# Altium PCB ESP32_CAN_V2.2.PcbDoc
Units mm, origin at the board's own origin, x right, y up, seen from the top; angles counter-clockwise.
Board outline 80 x 75 mm, 2 copper layers (Top Layer, Bottom Layer), stack 0.533 mm thick; 87 components, 94 nets, 361 pads, 61 vias.
Unrouted connection lines stored in the file: 66.
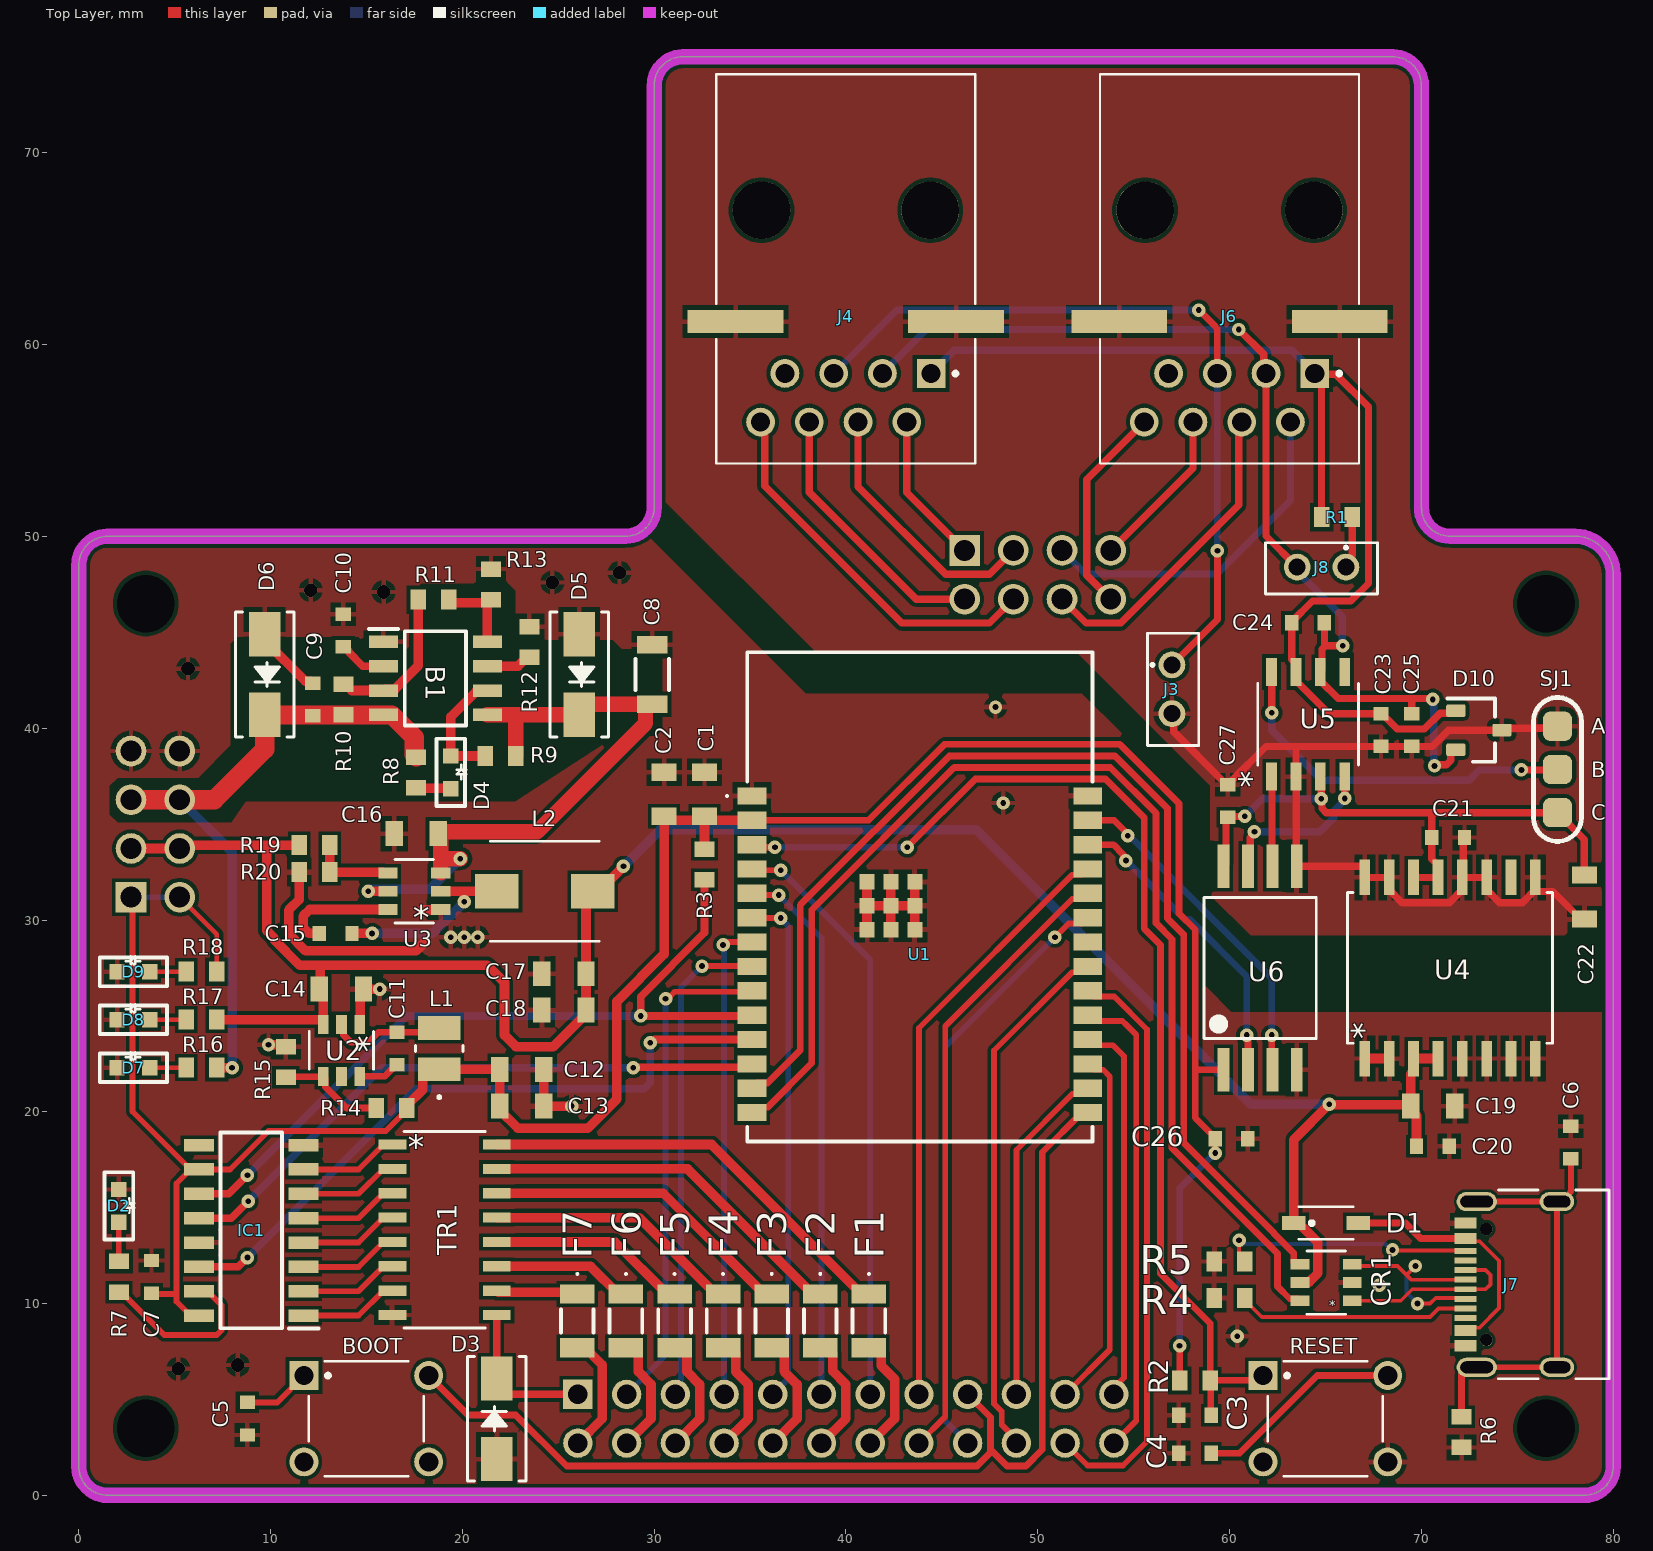
[diagram p0: Top Layer view]
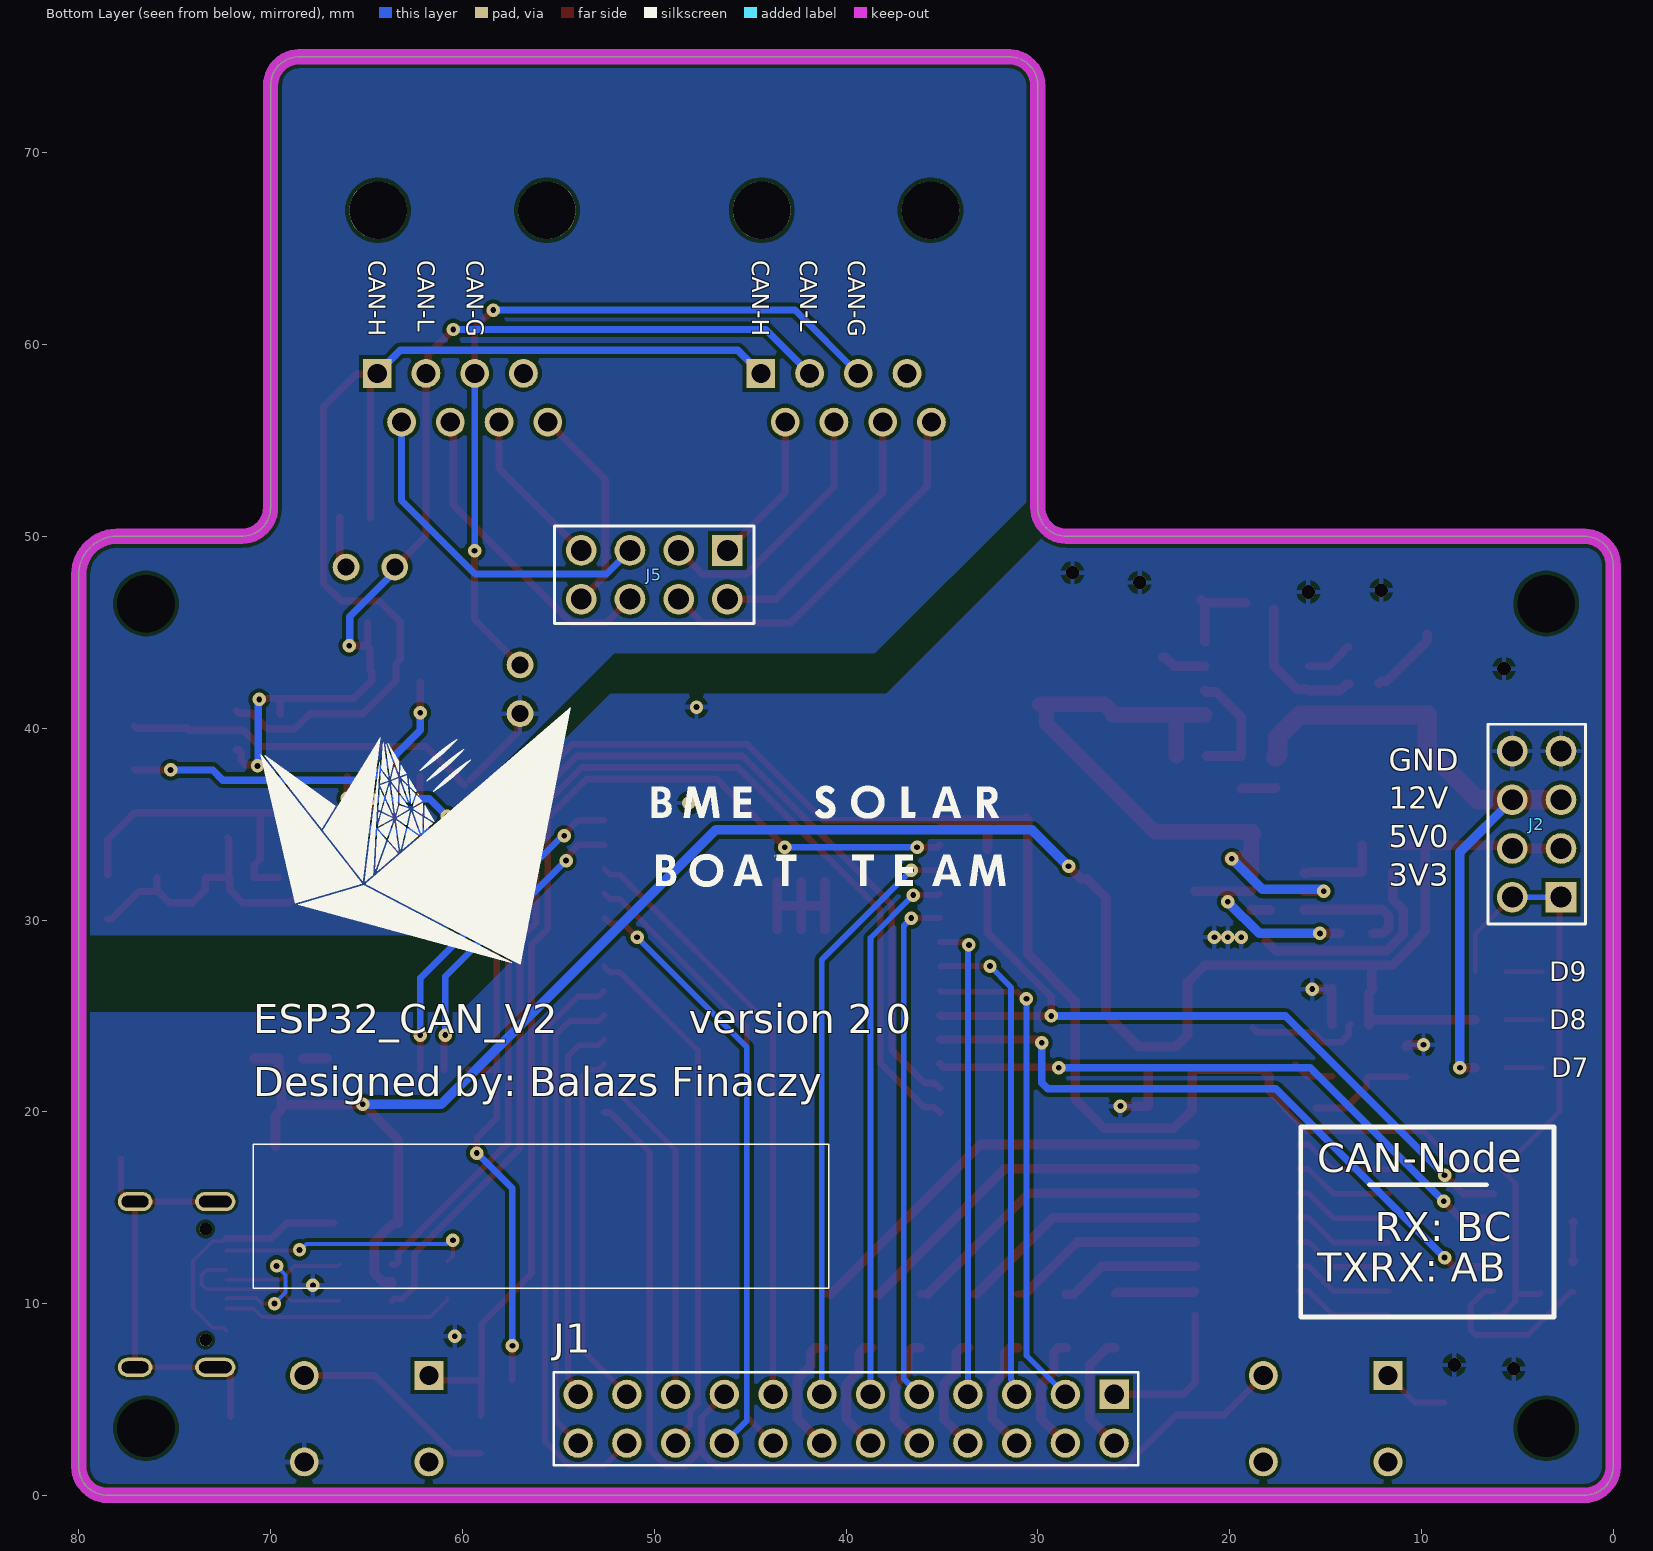
[diagram p1: Bottom Layer view, seen from below]
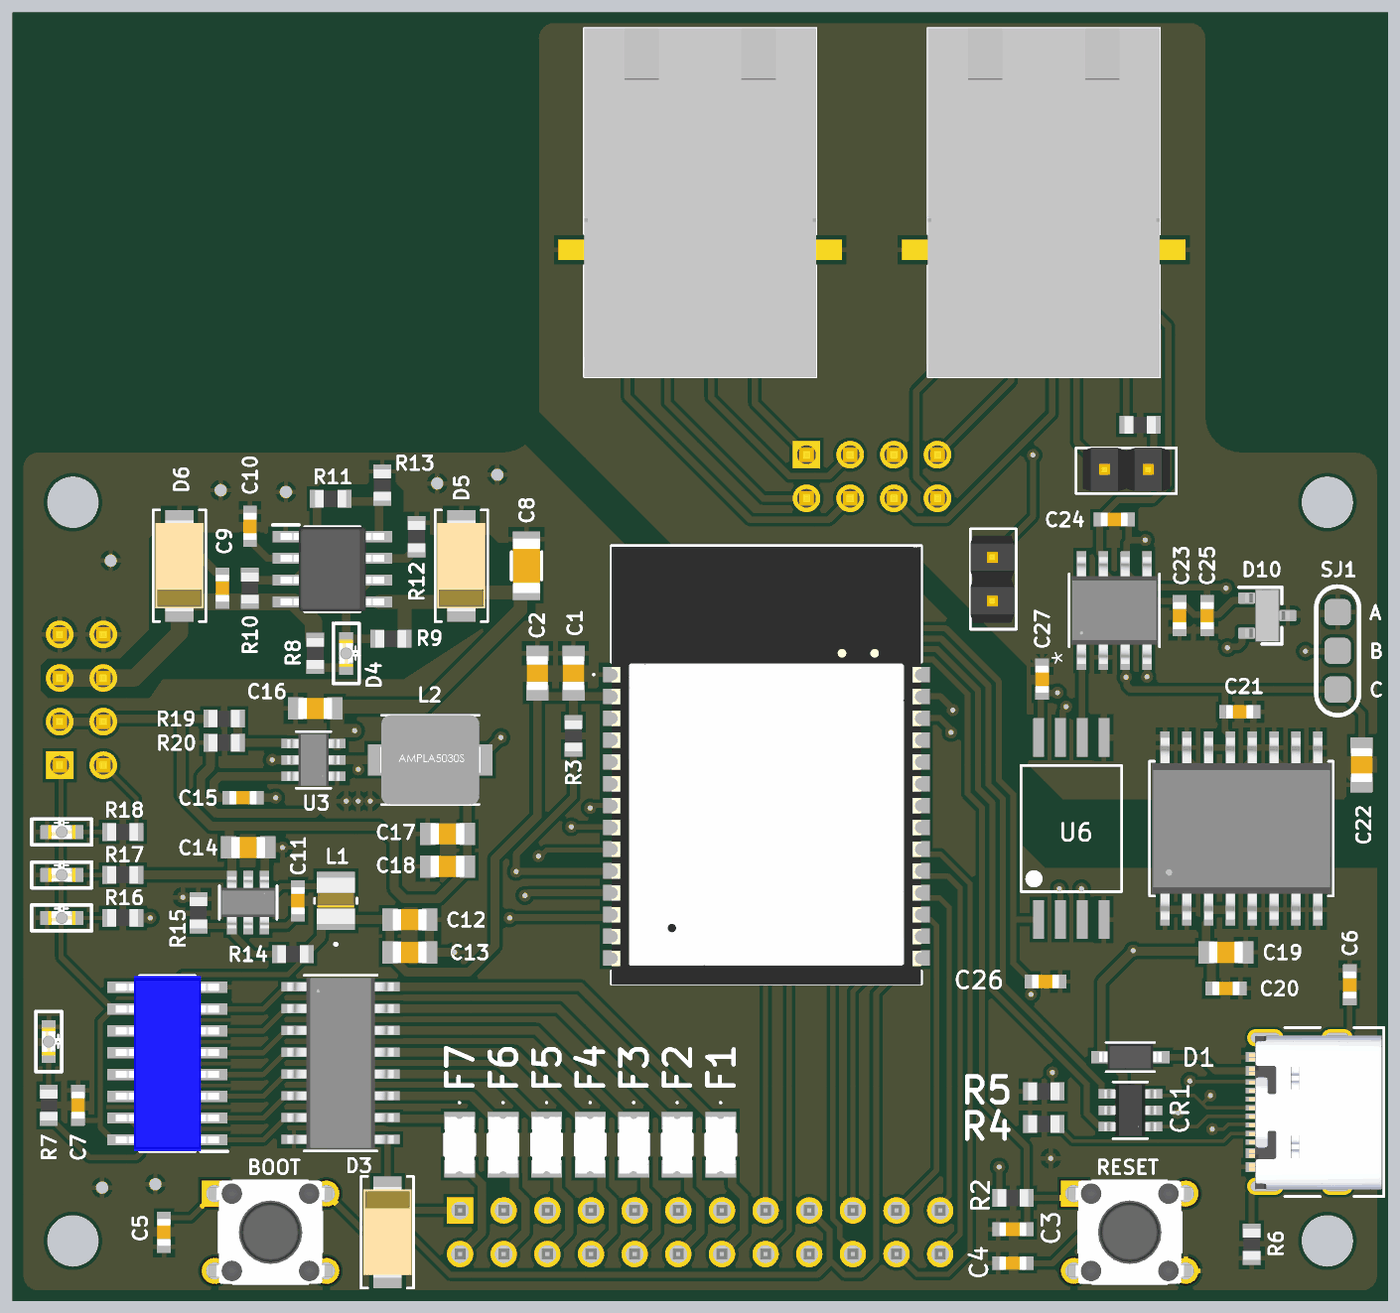
[diagram p2: 3D render of the assembled board from above, using the file's embedded part models]
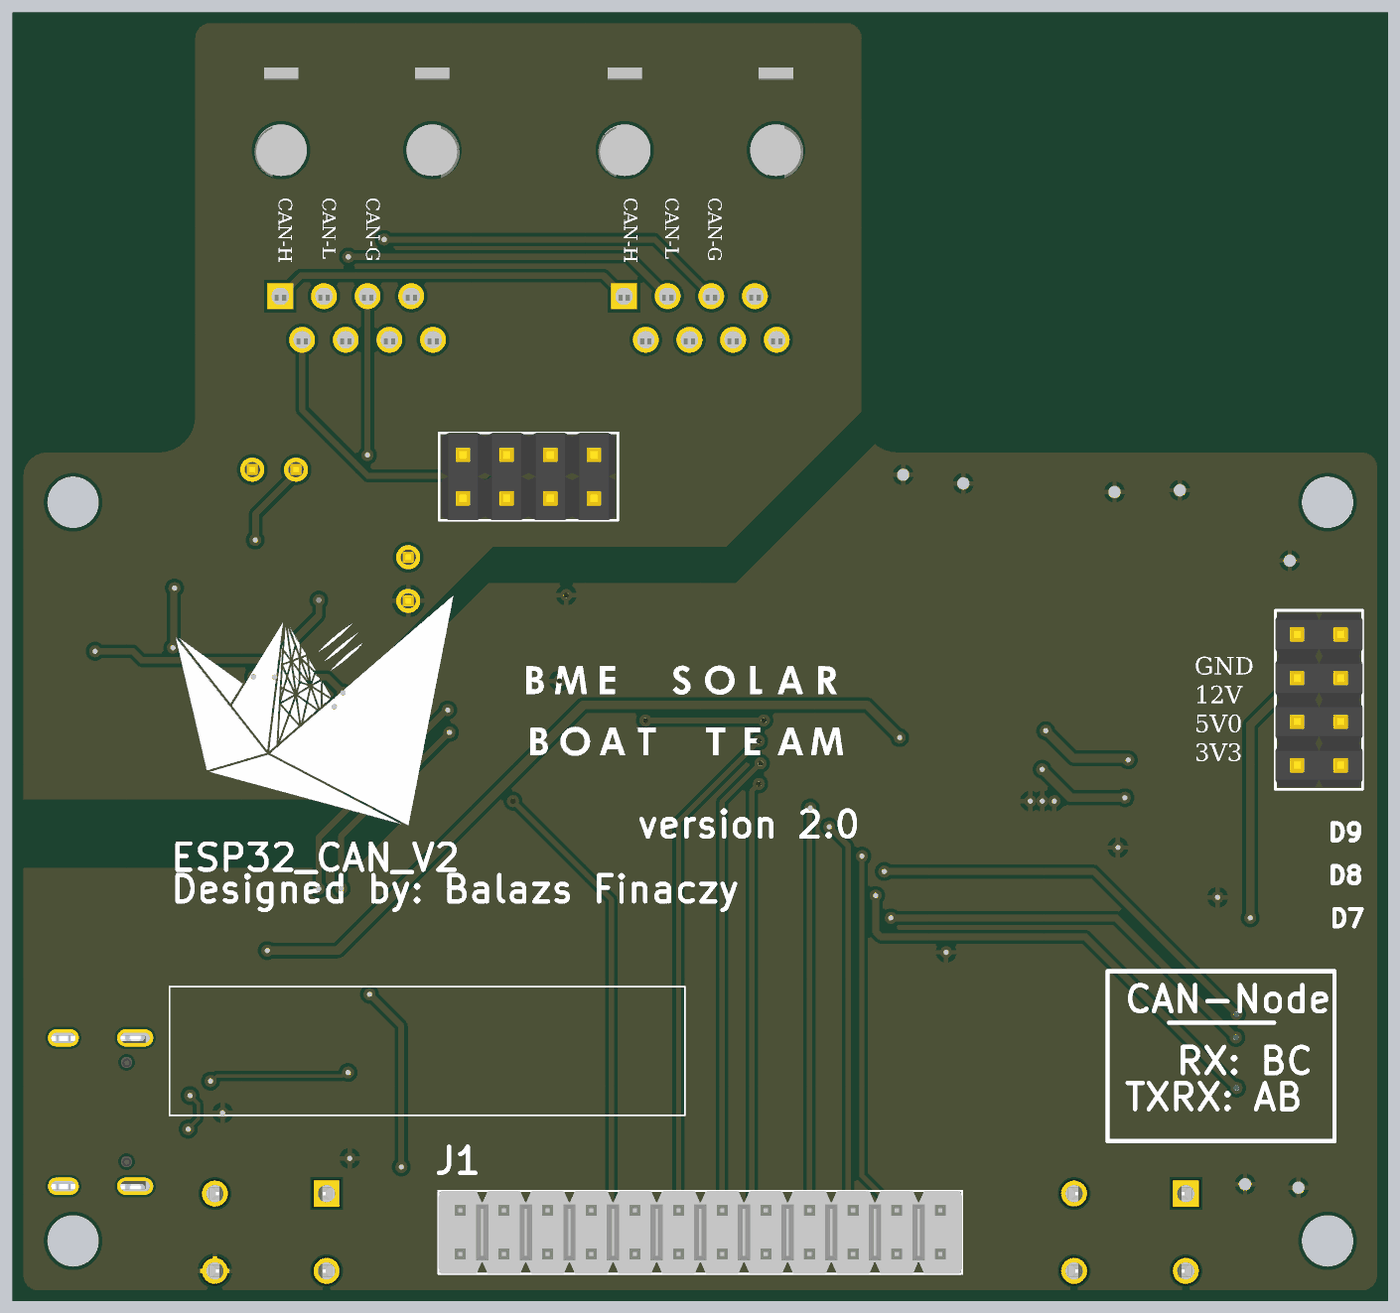
[diagram p3: 3D render of the assembled board from below, using the file's embedded part models]

## Layer stack, top to bottom
Top Solder: solder mask 0.0102, Solder Resist, Dk 3.5
Top Layer: signal copper 0.0356
Dielectric 2: prepreg 0.0711, PP-006, Dk 4.1
Dielectric 1: dielectric 0.32, FR-4, Dk 4.8
Dielectric 3: prepreg 0.0711, PP-006, Dk 4.1
Bottom Layer: signal copper 0.0356
Bottom Solder: solder mask 0.0102, Solder Resist, Dk 3.5

## Board outline
1.506,0.006 cw(c1.506,1.506) 0.006,1.506 0.006,48.506 cw(c1.506,48.506) 1.506,50.006 28.506,50.006 ccw(c28.506,51.506) 30.006,51.506 30.006,73.506 cw(c31.506,73.506) 31.506,75.006 68.506,75.006 cw(c68.506,73.506) 70.006,73.506 70.006,51.506 ccw(c71.506,51.506) 71.506,50.006 78.006,50.006 cw(c78.006,48.006) 80.006,48.006 80.006,1.506 cw(c78.506,1.506) 78.506,0.006

## Design rules (kind name [scope] priority, off if disabled: settings)
Clearance USB_C [InComponent('J7')] p1: gap=0.15 ignorepadtopadclearanceinfootprint=FALSE
Clearance [All] p2: gap=0.2 ignorepadtopadclearanceinfootprint=FALSE
HoleSize [All] p1: absolutevalues=TRUE maxlimit=4 minlimit=0.025 maxpercent=80.000 minpercent=20.000
HoleToHoleClearance [All] p1: gap=0.3 allowstackedmicrovias=TRUE
MinimumAnnularRing [All] p1: minimumring=0.19
PlaneClearance PlaneClearance_1 [All] p1: clearance=0.508
PlaneClearance [InNet('NetC15_1')] p2: clearance=0
PolygonConnect [All] p1: connectstyle=Relief reliefconductorwidth=0.254 reliefentries=4 polygonreliefangle="90 Angle" airgapwidth=0.254
RoutingVias [All] p1: holewidth=0.3 width=0.7 viastyle="Through Hole" minholewidth=0.3 minwidth=0.7 maxholewidth=0.45 maxwidth=1
SolderMaskExpansion [All] p1: expansion=0 istentingtop=FALSE
SupplyNets "Schematic Supply Nets_4" [InNet('+3V3')] p1: voltage=0.000
SupplyNets "Schematic Supply Nets_3" [InNet('+5V')] p2: voltage=0.000
SupplyNets "Schematic Supply Nets_2" [InNet('+12V_fused')] p3: voltage=0.000
SupplyNets "Schematic Supply Nets_1" [InNet('+12V')] p4: voltage=0.000
SupplyNets "Schematic Supply Nets" [InNet('GND')] p5: voltage=0.000
Width [All] p1: maxlimit=2 minlimit=0.2 preferedwidth=0.3 minimp=50.000000 maximp=50.000000 favimp=50.000000
27 further rules are at their usual default settings.

## Classes and differential pairs
net class OUT[6..0]: OUT0 OUT1 OUT2 OUT3 OUT4 OUT5 OUT6
net class GPIO[15..0]: GPIO0 GPIO1 GPIO2 GPIO3 GPIO4 GPIO5 GPIO6 GPIO7 GPIO8 GPIO9 GPIO10 GPIO11 GPIO12 GPIO13 GPIO14 GPIO15
component class U_ESP32_CAN_V2-usb: C6 CR1 D1 J7 R4 R5 R6
component class U_ESP32_CAN_V2-power: 3 B1 C8 C9 C10 C11 C12 C13 C14 C15 C16 C17 C18 D4 D5 D6 D7 D8 D9 L1 L2 R8 R9 R10 R11 R12 R13 R14 R15 R16 R17 R18 R19 R20 U2 U3
component class U_ESP32_CAN_V2-out: C7 D2 D3 F1 F2 F3 F4 F5 F6 F7 IC1 R7 TR1
component class U_ESP32_CAN_V2-mcu: BOOT C1 C2 C3 C4 C5 R2 R3 RESET U1
component class U_ESP32_CAN_V2-can: C19 C20 C21 C22 C23 C24 C25 C26 C27 D10 SJ1 U4 U5 U6
component class ESP32_CAN_V2-main: J1 J2 J3 J4 J5 J6 J8 R1

## Components (designator, comment, footprint, x,y, rotation, side; value= is the part's Value field where it differs from the comment)
B1 "TPS25921ADR" SOIC127P600X175-8N 18.6,42.6 r0 top
BOOT "TS02-66-70-BK-260-SCR-D" SW_TS02-66-70-BK-260-SCR-D 15,4 r0 top (schematic designator S2)
C1 "10u" C0805 32.627,36.554 r270 top
C2 "10u" C0805 30.527,36.554 r270 top
C3 "1u" C0603 58.2,4.177 r0 top
C4 "0.1u" C0603 58.2,2.2 r0 top
C5 "0.1u" C0603 8.8,4 r90 top
C6 "1n" C0603 77.8,18.4 r270 top
C7 "100n" C0603 3.8,11.4 r90 top
C8 "100u" C1206 29.9,42.8 r270 top
C9 "0.1u" C0603 12.2,41.5 r270 top
C10 "2n" C0603 13.8,45.1 r270 top
C11 "100n" C0603 16.6,23.3 r90 top
C12 "22u" C0805 23.1,22.2 r180 top
C13 "22u" C0805 23.1,20.3 r180 top
C14 "10u" C0805 13.7,26.4 r180 top
C15 "0.1u" C0603 13.4,29.3 r180 top
C16 "2u2" C0805 17.6,34.5 r0 top
C17 "22u" C0805 25.3,27.2 r0 top
C18 "22u" C0805 25.3,25.3 r0 top
C19 "10u" C0805 70.6,20.3 r180 top
C20 "100n" C0603 70.6,18.2 r180 top
C21 "100n" C0603 71.4,34.3 r180 top
C22 "10u" C0805 78.5,31.2 r90 top
C23 "47p" C0603 67.9,39.9 r90 top
C24 "47p" C0603 64.1,45.5 r180 top
C25 "47p" C0603 69.5,39.9 r270 top
C26 "100n" C0603 60.1,18.6 r180 top
C27 "100n" C0603 59.9,36.2 r270 top
CR1 "USBLC6-2SC6" SOT23-6L_STM 65.035,11.1 r180 top
D1 "1N5819HW-7-F" SOD3715X145N 65.035,14.2 r0 top
D2 "LED" LED 2.093,15.1 r90 top
D3 "SMAJ30A" SMASeries_LTF 21.8,4 r270 top
D4 "LED" LED 19.4,37.7 r90 top
D5 "SMAJ30A" SMASeries_LTF 26.1,42.8 r90 top
D6 "SMAJ58CA" SMASeries_LTF 9.7,42.8 r90 top
D7 "LED" LED 2.85,22.3 r180 top
D8 "LED" LED 2.85,24.8 r180 top
D9 "LED" LED 2.85,27.3 r180 top
D10 "NUP2105L" SOT-23 73,39.9 r0 top
F1 "PTC Fuse" PTSAHT120624V050 41.2,9.1 r270 top
F2 "PTC Fuse" PTSAHT120624V050 38.667,9.1 r270 top
F3 "PTC Fuse" PTSAHT120624V050 36.133,9.1 r270 top
F4 "PTC Fuse" PTSAHT120624V050 33.6,9.1 r270 top
F5 "PTC Fuse" PTSAHT120624V050 31.067,9.1 r270 top
F6 "PTC Fuse" PTSAHT120624V050 28.533,9.1 r270 top
F7 "PTC Fuse" PTSAHT120624V050 26,9.1 r270 top
IC1 "74HC595D" SOIC127P600X175-16N 9,13.821 r180 top
J1 "PinHeader_2x12" AMPHENOL_10129381-924003BLF 40,4 r0 bottom locked
J2 "Conn_2x4" CONN_10129381-X08002XLF_AMP 4,35 r90 bottom locked
J3 "Jumper_1x1" CON2_1X2_TU_TSW 57,42.03 r270 top
J4 "RJE56" AMPHENOL_RJE561881410 40,67 r180 top
J5 "Conn_2x4" CONN_10129381-X08002XLF_AMP 50,48 r0 bottom locked
J6 "RJE56" AMPHENOL_RJE561881410 60,67 r180 top
J7 "USB4105-GF-A" USB4105_GCT 75.8,11 r90 top
J8 "Jumper_1x1" CON2_1X2_TU_TSW 64.8,48.4 r180 top
L1 "LCENA2520MKT2R2M0NK" IND_LCEN_2520MK_TAY 18.8,23.3 r90 top
L2 "AMPLA5030S-6R8MT" IND_AMPLA5030S-6R8MT 24.3,31.5 r0 top
R1 "120R" R0603 65.6,51 r0 top
R2 "10k" R0603 58.2,6 r180 top
R3 "3k3" R0603 32.627,32.9 r90 top
R4 "5k1" R0603 60,10.3 r0 top
R5 "5k1" R0603 60,12.2 r0 top
R6 "100k" R0603 72.1,3.3 r90 top
R7 "120R" R0603 2.1,11.4 r90 top
R8 "1k" R0603 17.6,37.7 r90 top
R9 "100k" R0603 21.998,38.55 r0 top
R10 "470k" R0603 13.8,41.5 r270 top
R11 "64k9" R0603 18.5,46.7 r180 top
R12 "154k" R0603 23.5,44.5 r270 top
R13 "30k9" R0603 21.5,47.5 r270 top
R14 "31k6" R0603 16.302,20.2 r0 top
R15 "10k" R0603 10.8,22.6 r270 top
R16 "2.2k" R0603 6.4,22.307 r0 top
R17 "1k" R0603 6.4,24.807 r0 top
R18 "320R" R0603 6.4,27.307 r0 top
R19 "100k" R0603 12.3,33.9 r180 top
R20 "13k7" R0603 12.3,32.5 r0 top
RESET "TS02-66-70-BK-260-SCR-D" SW_TS02-66-70-BK-260-SCR-D 65,4 r0 top (schematic designator S1)
SJ1 "Solderj Jumper" "SolderJumper 1x2" 77.1,35.6 r90 top
TR1 "ULN2003ADR" ULN2003ADR2G_OSI 19.079,13.851 r0 top
U1 "ESP32-C6-WROOM-1-N4" ESP32C6WROOM1N4 43.855,31.21 r0 top
U2 "AP62250WU-7" TSOT26STANDARD_DIO 13.7,23.2 r270 top
U3 "LMR51430YDDCR" SOT-23-THIN-6_DDC_TEX 17.5,31.5 r180 top
U4 "R05CTE05S-R" SMD_16_10.35X7.5X2.5_RCP 71.5,27.5 r90 top
U5 "TCAN1051HGDR" D8_TEX 64.1,40.2 r90 top
U6 "ISO6721FQDWVRQ1" DWV0008A-IPC_A 61.6,27.5 r90 top

## Footprints (in the part's own frame and the unit in brackets; to place one, negate y for a bottom-side part, rotate by r counter-clockwise, add the part's x,y. Pads: shape width x height; smd on the part's side, far side on the other; paste and mask are expansions set on the pad)
AMPHENOL_10129381-924003BLF [mm]
  rect 1.53x1.53 / inner round 1.53 / far side rect 1.53x1.53 hole 1.02: 01(-13.97,-1.27)
  round 1.53 hole 1.02: 02(-13.97,1.27) 03(-11.43,-1.27) 04(-11.43,1.27) 05(-8.89,-1.27) 06(-8.89,1.27) 07(-6.35,-1.27) 08(-6.35,1.27) 09(-3.81,-1.27) 10(-3.81,1.27) 11(-1.27,-1.27) 12(-1.27,1.27) 13(1.27,-1.27) 14(1.27,1.27) 15(3.81,-1.27) 16(3.81,1.27) 17(6.35,-1.27) 18(6.35,1.27) 19(8.89,-1.27) 20(8.89,1.27) 21(11.43,-1.27) 22(11.43,1.27) 23(13.97,-1.27) 24(13.97,1.27)
  silkscreen extent -15.24,-2.41 15.24,2.41, body extent -15.24,-2.41 15.24,2.41, height 10.42
AMPHENOL_RJE561881410 [mm]
  rect 1.5x1.5 / inner round 1.5 / far side rect 1.5x1.5 hole 1: 1(-4.445,8.5)
  round 1.5 hole 1: 2(-3.175,11.04) 3(-1.905,8.5) 4(-0.635,11.04) 5(0.635,8.5) 6(1.905,11.04) 7(3.175,8.5) 8(4.445,11.04)
  rect 5x1.2 smd paste-3: G1(-5.75,5.8) G2(5.75,5.8)
  round 3 hole 3 unplated: ""(-4.4,0) ""(4.4,0)
  silkscreen extent -6.75,-7.1 6.75,13.2, body extent -6.75,-7.1 6.75,13.2, height 14.61
C0603 [mm] "Ceramic Capacitors, 0603, body 1.6x0.8mm"
  rect 0.7x0.8 smd: 1(-0.85,0) 2(0.85,0)
  body extent -0.8,-0.4 0.8,0.4, height 0.8
C0805 [mm] "Ceramic Capacitors, body 2x1.25mm"
  rect 0.9x1.3 smd: 1(-1.15,0) 2(1.15,0)
  body extent -1,-0.63 1,0.63, height 0.8
C1206 [mm] "Ceramic Capacitors, body 3.2x1.6mm"
  rect 0.9x1.6 smd: 1(-1.55,0) 2(1.55,0)
  silkscreen extent -0.8,-0.87 0.8,0.87, body extent -1.6,-0.8 1.6,0.8, height 0.95
CON2_1X2_TU_TSW [mil]
  round 55 hole 35 paste-99999 mask+0: 1(-50,0) 2(50,0)
  silkscreen extent -115,-50 115,55, body extent -100,-50 100,50, height 500
CONN_10129381-X08002XLF_AMP [mil]
  rect 63x63 hole 43 paste-99999 mask+0: 1(-150,-50)
  round 63 hole 43 paste-99999 mask+0: 2(-150,50) 3(-50,-50) 4(-50,50) 5(50,-50) 6(50,50) 7(150,-50) 8(150,50)
  silkscreen extent -205,-100 205,100, body extent -200,-100 200,100, height 338
D8_TEX [mm]
  rect 1.455x0.558 smd paste+0 mask+0: 1(-2.721,1.905) 2(-2.721,0.635) 3(-2.721,-0.635) 4(-2.721,-1.905) 5(2.721,-1.905) 6(2.721,-0.635) 7(2.721,0.635) 8(2.721,1.905)
  silkscreen extent -2.12,-2.63 2.12,2.63, body extent -3.1,-2.5 3.1,2.5, height 1.76
DWV0008A-IPC_A [mm]
  rect 2.254x0.622 smd paste+0 mask+0: 1(-5.301,1.905) 2(-5.301,0.635) 3(-5.301,-0.635) 4(-5.301,-1.905) 5(5.301,-1.905) 6(5.301,-0.635) 7(5.301,0.635) 8(5.301,1.905)
  silkscreen extent -3.67,-2.93 3.67,2.93
ESP32C6WROOM1N4 [mm]
  rect 1.5x0.9 smd: 1(-8.75,5.26) 2(-8.75,3.99) 3(-8.75,2.72) 4(-8.75,1.45) 5(-8.75,0.18) 6(-8.75,-1.09) 7(-8.75,-2.36) 8(-8.75,-3.63) 9(-8.75,-4.9) 10(-8.75,-6.17) 11(-8.75,-7.44) 12(-8.75,-8.71) 13(-8.75,-9.98) 14(-8.75,-11.25) 15(8.75,-11.25) 16(8.75,-9.98) 17(8.75,-8.71) 18(8.75,-7.44) 19(8.75,-6.17) 20(8.75,-4.9) 21(8.75,-3.63) 22(8.75,-2.36) 23(8.75,-1.09) 24(8.75,0.18) 25(8.75,1.45) 26(8.75,2.72) 27(8.75,3.99) 28(8.75,5.26)
  rect 0.8x0.8 smd: 29(-1.505,-0.46) 30(-1.505,0.79) 31(-2.755,0.79) 32(-2.755,-0.46) 33(-2.755,-1.71) 34(-1.505,-1.71) 35(-0.255,-1.71) 36(-0.255,-0.46) 37(-0.255,0.79)
  silkscreen extent -10.1,-12.75 9,12.75, body extent -9.01,-12.8 9.01,12.7, height 3.1
IND_AMPLA5030S-6R8MT [mm]
  rect 2.25x1.8 smd: 1(-2.5,0) 2(2.5,0)
  silkscreen extent -2.85,-2.6 2.85,2.6, body extent -2.92,-2.6 2.92,2.6, height 2.8
IND_LCEN_2520MK_TAY [mil]
  rect 48.78x87 smd paste+0 mask+0: 1(-42.39,0) 2(42.39,0)
  silkscreen extent -103,-48 6,48, body extent -53,-44 53,44, height 47
LED [mm]
  rect 0.8x0.8 smd: 1(-0.85,0) 2(0.85,0)
  silkscreen extent -1.75,-0.8 1.75,0.75, body extent -0.8,-0.4 0.8,0.4, height 0.95
PTSAHT120624V050 [mm]
  rect 1x1.8 smd: 1(-1.4,0) 2(1.4,0)
  silkscreen extent -2.5,-0.85 0.6,0.85, body extent -1.62,-0.85 1.68,0.85, height 1.06
R0603 [mm]
  rect 0.808x1.041 smd paste+0 mask+0: 1(-0.798,0) 2(0.798,0)
  body extent -0.9,-0.5 0.9,0.5, height 0.56
SMASeries_LTF [mm]
  rect 2.3x1.651 smd paste+0 mask+0: 1(-2.1,0) 2(2.1,0)
  silkscreen extent -3.25,-1.54 3.25,1.52, body extent -2.64,-1.4 2.64,1.4, height 2.34
SMD_16_10.35X7.5X2.5_RCP [mm]
  rect 1.849x0.558 smd paste+0 mask+0: 1(-4.722,4.445) 2(-4.722,3.175) 3(-4.722,1.905) 4(-4.722,0.635) 5(-4.722,-0.635) 6(-4.722,-1.905) 7(-4.722,-3.175) 8(-4.722,-4.445) 9(4.722,-4.445) 10(4.722,-3.175) 11(4.722,-1.905) 12(4.722,-0.635) 13(4.722,0.635) 14(4.722,1.905) 15(4.722,3.175) 16(4.722,4.445)
  silkscreen extent -3.92,-5.35 3.92,5.35, body extent -5.3,-5.22 5.3,5.22, height 2.64
SOD3715X145N [mm]
  rect 1.21x0.73 smd: A(1.68,0) C(-1.68,0)
  silkscreen extent -1.43,-0.85 1.43,0.85, body extent -1.83,-0.77 1.83,0.77, height 1.51
SOIC127P600X175-8N [mm]
  rect 1.528x0.65 smd: 1(-2.711,1.905) 2(-2.711,0.635) 3(-2.711,-0.635) 4(-2.711,-1.905) 5(2.711,-1.905) 6(2.711,-0.635) 7(2.711,0.635) 8(2.711,1.905)
  silkscreen extent -3.47,-2.45 1.6,2.58, body extent -3.01,-2.45 3.01,2.45, height 1.63
SOIC127P600X175-16N [mm]
  rect 1.55x0.65 smd: 1(-2.725,4.445) 2(-2.725,3.175) 3(-2.725,1.905) 4(-2.725,0.635) 5(-2.725,-0.635) 6(-2.725,-1.905) 7(-2.725,-3.175) 8(-2.725,-4.445) 9(2.725,-4.445) 10(2.725,-3.175) 11(2.725,-1.905) 12(2.725,-0.635) 13(2.725,0.635) 14(2.725,1.905) 15(2.725,3.175) 16(2.725,4.445)
  silkscreen extent -3.5,-5.1 1.6,5.12, body extent -3,-5.1 3,5.1, height 1.56
"SolderJumper 1x2" [mil]
  rrect50% 60x60 smd: 1(88.58,0) 2(0,0) 3(177.17,0)
  silkscreen extent -59,-49 236,49
SOT23-6L_STM [mil]
  rect 38.5x22 smd paste+0 mask+0: 1(-53.75,37.4) 2(-53.75,0) 3(-53.75,-37.4) 4(53.75,-37.4) 5(53.75,0) 6(53.75,37.4)
  silkscreen extent -40,-65 40,65, body extent -59,-60 59,60, height 57
SOT-23 [mm] "SOT23, 3-Leads, IPC Medium Density, TO-236"
  rrect25% 1x0.65 smd: 1(-1.2,1.02) 2(-1.2,-1.02) 3(1.2,0)
  silkscreen extent -1.65,-1.65 0.85,1.65, body extent -1.3,-1.52 1.3,1.52, height 1.3
SOT-23-THIN-6_DDC_TEX [mm]
  rect 0.998x0.558 smd paste+0 mask+0: 1(-1.375,0.95) 2(-1.375,0) 3(-1.375,-0.95) 4(1.375,-0.95) 5(1.375,0) 6(1.375,0.95)
  silkscreen extent -1,-1.65 1,1.65, body extent -1.52,-1.52 1.52,1.52, height 1.09
SW_TS02-66-70-BK-260-SCR-D [mm]
  rect 1.508x1.508 / inner round 1.508 / far side rect 1.508x1.508 hole 1 mask+0.102: 1(-3.25,2.25)
  round 1.508 hole 1 mask+0.102: 2(3.25,2.25) 3(-3.25,-2.25) 4(3.25,-2.25)
  silkscreen extent -3,-3 3,3, body extent -3.6,-3 3.6,3, height 7
TSOT26STANDARD_DIO [mm]
  rect 0.998x0.558 smd paste+0 mask+0: 1(-1.35,0.95) 2(-1.35,0) 3(-1.35,-0.95) 4(1.35,-0.95) 5(1.35,0) 6(1.35,0.95)
  silkscreen extent -0.98,-1.68 0.98,1.68, body extent -1.5,-1.55 1.5,1.55, height 0.99
ULN2003ADR2G_OSI [mm]
  rect 1.455x0.533 smd paste+0 mask+0: 1(-2.721,4.445) 2(-2.721,3.175) 3(-2.721,1.905) 4(-2.721,0.635) 5(-2.721,-0.635) 6(-2.721,-1.905) 7(-2.721,-3.175) 8(-2.721,-4.445) 9(2.721,-4.445) 10(2.721,-3.175) 11(2.721,-1.905) 12(2.721,-0.635) 13(2.721,0.635) 14(2.721,1.905) 15(2.721,3.175) 16(2.721,4.445)
  silkscreen extent -2.12,-5.12 2.12,5.12, body extent -3.1,-4.99 3.1,4.99, height 1.73
USB4105_GCT [mil]
  round 26 / inner round 60 / far side round 26 hole 26 unplated paste-99999 mask+0: 17(-113.78,94.91) 18(113.78,94.91)
  rect 23x45 smd paste+0 mask+0: A1-B12(-125.98,137.24) A4-B9(-94.49,137.24) B1-A12(125.98,137.24) B4-A9(94.49,137.24)
  rect 12x45 smd paste+0 mask+0: A5(-49.21,137.24) A6(-9.84,137.24) A7(9.84,137.24) A8(49.21,137.24) B5(68.9,137.24) B6(29.53,137.24) B7(-29.53,137.24) B8(-68.9,137.24)
  oval 39.37x70.87 / inner oval 39x71 / far side oval 39.37x70.87 hole 55 slot 24 at 0 deg paste-99999 mask+0: SHELL(-170.08,-49.97) SHELL(170.08,-49.97)
  oval 39.37x82.68 / inner oval 39x83 / far side oval 39.37x82.68 hole 67 slot 24 at 0 deg paste-99999 mask+0: SHELL(-170.08,114.6) SHELL(170.08,114.6)
  silkscreen extent -194,-157 194,70, body extent -177,-152 175,152, height 130

## Part data
B1: "18V, 1.6A, 90m eFuse with Adjustable +/-2% Accurate Current Limit", Manufacturer_Name="Texas Instruments", Mouser Part Number=595-TPS25921ADR, Datasheet Link=http://www.ti.com/lit/gpn/tps25921a, Geometry.Height=1.75mm, Manufacturer_Part_Number=TPS25921ADR, Mouser Price/Stock=https://www.mouser.co.uk/ProductDetail/Texas-Instruments/TPS25921ADR?qs=m%2F7bTylgptfvwfVPRm0ALQ%3D%3D
BOOT RESET: "6 x 6 mm, 7 mm Actuator Height, 260 gf, Black, Short Crimped, Through Hole, SPST, Tactile Switch", Package=None, Check_prices=https://www.snapeda.com/parts/TS02-66-70-BK-260-SCR-D/Same+Sky/view-part/?ref=eda, MF="Same Sky", MP=TS02-66-70-BK-260-SCR-D, SnapEDA_Link=https://www.snapeda.com/parts/TS02-66-70-BK-260-SCR-D/Same+Sky/view-part/?ref=snap
C1 C2 C3 C4 C5 C6 C7 C8 C9 C10 C11 C12 C13 C14 C15 C16 C17 C18 C19 C20 C21 C22 C23 C24 C25 C26 C27: library part C
CR1: "ESD Protection for USB 2.0 High Speed", Manufacturer_Name=STMicroelectronics, Copyright="Copyright (C) 2025 Ultra Librarian. All rights reserved.", Manufacturer_Part_Number=USBLC6-2SC6, RefDes=RefDes, Type=Type
D1: "Diode Schottky 40 V 1A Surface Mount SOD-123", Package="SOD-123 Fairchild Semiconductor", Availability="In Stock", Check_prices=https://www.snapeda.com/parts/1N5819HW-7-F/Diodes+Inc./view-part/?ref=eda, MF="Diodes Inc.", MP=1N5819HW-7-F, Price=None, Purchase-URL=https://pricing.snapeda.com/search/part/1N5819HW-7-F/?ref=eda, SnapEDA_Link=https://www.snapeda.com/parts/1N5819HW-7-F/Diodes+Inc./view-part/?ref=snap
D3 D5 D6: "No Description Available", Manufacturer_Name="Littelfuse Inc", Copyright="Copyright (C) 2026 Ultra Librarian. All rights reserved."
  D3 D5: Manufacturer_Part_Number=SMAJ30A
  D6: Manufacturer_Part_Number=SMAJ58CA
D4: "150060RS83000"
D7: "150060AS83000"
D8: "150060YS83000"
D9: "150060VS83000"
D10: library part TVS-Bidirectional-Diode_Dual, ki_description="TVS Dual Diode", ki_keywords="TVS Dual Diode"
F1 F2 F3 F4 F5 F6 F7: "PTSAHT1206"
IC1: "Shift Register Single 8-Bit Serial to Serial/Parallel 16-Pin SOIC T/R", Manufacturer_Name=Toshiba, Mouser Part Number=757-74HC595D, Datasheet Link=https://toshiba.semicon-storage.com/info/docget.jsp?did=36768&prodName=74HC595D, Geometry.Height=1.75mm, Manufacturer_Part_Number=74HC595D, Mouser Price/Stock=https://www.mouser.co.uk/ProductDetail/Toshiba/74HC595D?qs=7EBvPakHacViJoQmXKcnew%3D%3D
J1: Package=None, Availability=Unavailable, MF="{'manufacturer': u'Amphenol ICC (FCI)'}", MP=10129381-924003BLF, Price=None
J2 J5: library part PinHeader_2x4, Manufacturer_Name="Amphenol ICC", Manufacturer_Part_Number=10129381-908002BLF, Copyright="Copyright (C) 2026 Ultra Librarian. All rights reserved.", RefDes=RefDes, Type=Type
J3 J8: library part TSW-102-08-T-S, "No Description Available", Manufacturer_Name="Samtec Inc", Copyright="Copyright (C) 2026 Ultra Librarian. All rights reserved.", Manufacturer_Part_Number=TSW-102-08-T-S, RefDes=RefDes, Type=Type
J4 J6: library part RJE561881410, "Modular Jack - Right Angle, Input Output Connectors 8P8C, Without Shield .", Package=None, Check_prices=https://www.snapeda.com/parts/RJE561881410/Amphenol/view-part/?ref=eda, MF="Amphenol Commercial Products", MP=RJE561881410, Reference=RJE56-188-1410, SnapEDA_Link=https://www.snapeda.com/parts/RJE561881410/Amphenol/view-part/?ref=snap, Supplier=Farnell, Type=RJE56
J7: "Description", Manufacturer_Name="Global Connector Technology", Copyright="Copyright (C) 2025 Ultra Librarian. All rights reserved.", Manufacturer_Part_Number=USB4105-GF-A, RefDes=RefDes, Type=Type
L1: library part L, "No Description Available", Manufacturer_Name="TAIYO YUDEN", Copyright="Copyright (C) 2026 Ultra Librarian. All rights reserved.", Manufacturer_Part_Number=LCENA2520MKT2R2M0NK
L2: "Inductor Power Shielded/Molded Wirewound 6.8uH 20% 100KHz Carbonyl Powder 4A 0.0762Ohm DCR 2220 T/R", Package=Package, Availability=Unavailable, Check_prices=https://www.snapeda.com/parts/AMPLA5030S-6R8MT/Abracon+LLC/view-part/?ref=eda, MF="Abracon LLC", MP=AMPLA5030S-6R8MT, Price=None, SnapEDA_Link=https://www.snapeda.com/parts/AMPLA5030S-6R8MT/Abracon+LLC/view-part/?ref=snap
R1 R2 R3 R4 R5 R6 R7 R8 R9 R10 R11 R12 R13 R14 R15 R16 R17 R18 R19 R20: library part R
SJ1: library part "Solder Jumper 1x2"
TR1: library part ULN2003ADR2G, "No Description Available", Manufacturer_Name=onsemi, Copyright="Copyright (C) 2026 Ultra Librarian. All rights reserved.", Manufacturer_Part_Number=ULN2003ADR2G, RefDes=RefDes, Type=Type
U1: library part ESP32-C6-WROOM-1-N4_reorder, "802.15.4, Bluetooth, WiFi Bluetooth v5.0, Zigbee Transceiver Module 2.4GHz PCB Trace Surface Mount", Manufacturer_Name="Espressif Systems", Mouser Part Number=356-ESP32C6WROOM1N4, Datasheet Link=https://www.espressif.com/sites/default/files/documentation/esp32-c6-wroom-1_wroom-1u_datasheet_en.pdf, Geometry.Height=3.25mm, Manufacturer_Part_Number=ESP32-C6-WROOM-1-N4, Mouser Price/Stock=https://www.mouser.co.uk/ProductDetail/Espressif-Systems/ESP32-C6-WROOM-1-N4?qs=8Wlm6%252BaMh8R1JRAtXlt87w%3D%3D
U2: "No Description Available", Manufacturer_Name="Diodes Inc", Copyright="Copyright (C) 2026 Ultra Librarian. All rights reserved.", Manufacturer_Part_Number=AP62250WU-7, RefDes=RefDes, Type=Type
U3: "SIMPLE SWITCHER&reg; 4.5-V to 36-V, 3-A synchronous buck converter with 40-&micro;A IQ 6-SOT-23-THIN -40 to 150", Manufacturer_Name="Texas Instruments", Copyright="Copyright (C) 2025 Ultra Librarian. All rights reserved.", Manufacturer_Part_Number=LMR51430YDDCR, RefDes=RefDes, Type=Type
U4: "DC/DC converter", Manufacturer_Name="Recom Power", Copyright="Copyright (C) 2026 Ultra Librarian. All rights reserved.", Manufacturer_Part_Number=R05CTE05S-R, RefDes=RefDes, Type=Type
U5: "Fault Protected CAN Transceiver With Flexible Data-Rate 8-SOIC -55 to 125", Manufacturer_Name="Texas Instruments", Copyright="Copyright (C) 2026 Ultra Librarian. All rights reserved.", Datasheet=https://www.ti.com/lit/gpn/tcan1051hg, Manufacturer_Part_Number=TCAN1051HGDR, RefDes=RefDes, Type=Type
U6: "Automotive, general-purpose, dual-channel, 1/1 digital isolator 8-SOIC -40 to 125", Manufacturer_Name="Texas Instruments", Copyright="Copyright (C) 2026 Ultra Librarian. All rights reserved.", Datasheet=https://www.ti.com/lit/gpn/iso6721-q1, Manufacturer_Part_Number=ISO6721FQDWVRQ1, RefDes=RefDes, Type=TYPE

## Free pads (board coordinates)
  round 0 hole 3 unplated: 12(3.5,46.5) 13(3.5,3.5) 14(76.5,3.5) 15(76.5,46.5)

## Via types
v1: diameter 0.7, hole 0.3, Top Layer to Bottom Layer, tented both sides, 54 vias
v2: diameter 0.711, hole 0.711, Top Layer to Bottom Layer, tented both sides, 7 vias

## Nets (pads, with @x,y where several pads share a name; then routed paths per layer and width w, separated by ;. In a path a pad name is that pad's centre, name@x,y a point inside that pad or via, vN(x,y) a via of type N, cw(c..) or ccw(c..) an arc to the next point about the centre after c; other vN are vias at no path point)
5V0_CAN_6: C21.2 C22.2 C27.2 SJ1.2 U4.13 U4.14 U5.3 U6.8 | length 30.5
  Top Layer w0.381: U6.8 59.816,32.921 59.816,35.1 60.116,35.4 60.785,35.4 v1(60.794,35.409) ; U5.3 64.781,37.433 v1(64.781,36.32) 64.825,36.275 64.825,35.823 65.049,35.6 70.5,35.6 ; U4.14 U4.13 70.865,32.867 70.55,33.182 C21.2 70.55,35.55 70.5,35.6 ; C22.2 78.5,34.2 SJ1.2 70.5,35.6
  Bottom Layer w0.381: v1(60.794,35.409) 60.809,35.409 61.72,36.32 v1(64.781,36.32)
+3V3: C1.2 C2.2 C7.1 C12.2 C13.2 C26.2 IC1.10 IC1.16 J2.1 J2.2 L1.1 R2.2 R3.2 R14.2 R18.2 U1.2 U6.1 | length 140.6
  Top Layer w0.25: J2.2 7.198,29.262 R18.2
  Top Layer w0.3: J2.1 2.804,31.116 2.804,20.017 5.825,16.996 5.096,16.267 5.096,10.5 ; C7.1 3.85,10.5 5.096,10.5 ; IC1.16 5.825,9.376 5.096,10.105 5.096,10.5 ; IC1.10 7.896,16.996 9.895,18.995 16.011,18.995 17.1,20.084 R14.2
  Top Layer w0.35: U1.2 41.185,35.2 45.146,39.161 54.283,39.161 57.371,36.073 57.371,30.338 58.212,29.497 58.212,22.2 58.212,19.688 59.25,18.65 C26.2 ; v1(57.4,7.8) 57.402,7.798 R2.2 ; 58.213,22.199 U6.1 ; v1(59.251,17.851) C26.2
  Top Layer w0.5: R14.2@17.1,20.316 17.945,21.161 17.945,21.854 18.315,22.223 L1.1 18.812,22.212 21.938,22.212 C12.2 C13.2 21.95,20.1 22.904,19.146 26.546,19.146 28.061,20.661 28.061,25.761 30.527,28.227 30.527,35.204 30.627,35.304 30.727,35.204 31.216,35.204 31.22,35.2 32.223,35.2 32.427,35.404 C1.2 ; R3.2 C1.2 ; U1.2 33.32,35.2 33.316,35.204 32.827,35.204 C1.2
  Bottom Layer w0.3: J2.1 J2.2
  Bottom Layer w0.35: v1(57.4,7.8) 57.4,16 v1(59.251,17.851)
+5V: C14.2 C17.2 C18.2 C19.2 C20.2 CR1.5 D1.C J2.3 J2.4 L2.2 R17.2 R19.2 U2.3 U4.3 U4.4 | length 116.9
  Top Layer w0.5: J2.3 J2.4 5.44,33.9 R19.2 ; R17.2 U2.3@12.661,24.807 ; 9.8,33.677 9.8,29.452 10.192,29.06 10.192,28.975 11.525,27.642 12.6,27.642 ; U2.3 12.75,26.2 C14.2 12.6,26.45 12.6,27.642 ; C18.2@26.45,25.1 24.75,23.4 22.8,23.4 22.2,24 22.2,26.75 21.308,27.642 12.6,27.642 ; C18.2 C17.2 26.45,31.15 L2.2 27.45,32.15 27.75,32.15 v1(28.4,32.8) ; CR1.5 63.699,11.129 64.154,11.129 64.608,11.584 64.608,13.186 63.595,14.2 D1.C 63.355,18.555 v1(65.2,20.4) 65.238,20.362 69.388,20.362 C19.2 ; C20.2 69.75,19.8 69.45,20.1 C19.2 ; U4.4 U4.3 69.595,22.133 69.45,21.988 C19.2
  Bottom Layer w0.5: v1(28.4,32.8) 30.3,34.7 46.8,34.7 61.1,20.4 v1(65.2,20.4)
+12V: B1.4 C9.2 D6.1 J2.5 J2.6 R8.2 R10.2 R16.2 | length 35.1
  Top Layer w0.5: R16.2 7.205,22.3 v1(8,22.3)
  Top Layer w1: J2.5 J2.6 7.07,36.27 9.7,38.9 D6.1 9.705,40.695 B1.4 16.328,40.695 17.5,39.523 17.5,38.598 R8.2
  Bottom Layer w0.5: J2.6 8,33.54 v1(8,22.3)
+12V_fused: B1.5 C8.2 C16.2 D5.1 R9.2 U3.3 U3.5 | length 34.8
  Top Layer w0.5: v1(15.1,31.5) U3.5
  Top Layer w0.8: C16.2 18.875,34.375 U3.3 ; C16.2@18.804,34.6 23.9,34.6 29.551,40.251 29.551,41.2 29.601,41.25 C8.2 26.525,41.25 26.1,40.825 D5.1 26.095,40.695 22.8,40.695 ; 19.196,33.2 v1(19.9,33.2) ; B1.5 22.8,40.695 ; R9.2 22.795,40.69 22.8,40.695
  Bottom Layer w0.5: v1@15.113,31.592 15.167,31.538 15.192,31.538 15.251,31.596 18.296,31.596 v1(19.9,33.2)
CAN_GND: C21.1 C22.1 C23.1 C25.2 C27.1 D10.3 J3.2 J4.G1 J4.G2 J6.G1 J6.G2 SJ1.3 U4.9 U4.11 U4.12 U4.15 U4.16 U5.2 U6.5 | length 51.2
  Top Layer w0.381: J3.2 57.087,40.673 57.087,39.813 C27.1@59.6,37.3 ; C27.1 59.95,37.05 60.11,37.21 60.11,37.26 61.9,39.05 63.5,39.05 ; C21.1 72.192,34.242 72.192,32.279 U4.12 ; D10.3@74.266,39.9 71.414,39.9 70.564,39.05 C25.2 C23.1 63.5,39.05 ; D10.3@74.3,40 77,40 SJ1.3 ; U4.9 U4.9@75.945,31.576 ; C22.1 78.3,30.05 76.862,31.488 76.034,31.488 U4.9@75.945,31.576 ; 63.5,39.05 63.465,39.015 U5.2 63.485,37.459 63.485,32.821 U6.5 66.966,32.801 67.055,32.712 U4.16 U4.15 68.325,31.576 68.995,30.907 71.465,30.907 72.135,31.576 U4.12 ; U4.12 U4.11 73.405,31.576 74.075,30.907 75.275,30.907 U4.9@75.945,31.576
CAN_RX_6: U5.4 U6.7 | length 8.8
  Top Layer w0.381: U6.7 61.086,32.921 61.086,34.299 61.3,34.514 v1(61.3,34.6) ; v1(66.005,36.341) U5.4
  Bottom Layer w0.381: v1(61.3,34.6) 64.7,34.6 65.436,35.336 65.436,35.686 66.005,36.254 v1(66.005,36.341)
CAN_TX_6: U5.1 U6.6 | length 4.7
  Top Layer w0.381: U5.1 62.215,37.459 62.215,32.821 U6.6
GND: B1.1 C1.1 C2.1 C3.1 C4.1 C5.1 C6.1 C7.2 C8.1 C9.1 C10.1 C12.1 C13.1 C14.1 C16.1 C17.1 C18.1 C19.1 C20.1 C26.1 CR1.2 D2.2 D3.2 D5.2 D6.2 D7.2 D8.2 D9.2 IC1.8 IC1.13 J2.7 J2.8 J7.A1-B12 J7.B1-A12 R4.1 R5.1 R6.1 R12.1 R13.1 R15.1 R20.1 RESET.4 TR1.8 U1.1 U1.28 U1.29 U1.30 U1.31 U1.32 U1.33 U1.34 U1.35 U1.36 U1.37 U2.1 U3.1 U4.1 U4.2 U4.5 U4.6 U4.7 U4.8 U6.4 | length 34.2
  Top Layer w0.3: IC1.13 IC1.13@6.282,13.193
  Top Layer w0.5: D6.2 9.7,44.575 11.826,42.45 12.1,42.45 C9.1 ; v1(9.9,23.5) 10.698,23.5 R15.1 ; R20.1 11.502,31.069 10.946,30.512 10.946,29.288 11.838,28.396 17.596,28.396 18.1,28.9 ; U2.1 14.679,24.579 C14.1@14.679,26.429 ; C14.1 v1(15.7,26.4) ; 17.9,30.5 17.921,30.521 18.846,30.521 U3.1 ; C12.1 C13.1 v1(25.7,20.3) ; U1.33 U1.32 ; U1.31 U1.32 ; U1.34 U1.29 ; U1.30 U1.29 ; U1.35 U1.36 ; U1.37 U1.36 ; U4.1 U4.2 ; U1.32 U1.29 ; U1.29 U1.36
  other v1: 60.4,8.3 67.8,10.95 19.4,29.1 20.1,29.1 20.8,29.1 48.2,36.1 47.8,41.1
  other v2: 5.2,6.6 8.3,6.8 5.7,43.1 15.9,47.1 12.1,47.2 24.7,47.6 28.2,48.1
GPIO0: J1.03 U1.9 | length 26.1
  Top Layer w0.3: v1(30.6,25.9) 30.708,25.9 31.063,26.254 35.049,26.254 U1.9
  Bottom Layer w0.3: J1.03 30.6,7.3 v1(30.6,25.9)
GPIO1: J1.05 U1.8 | length 25.5
  Top Layer w0.3: v1(32.5,27.6) 35.085,27.6 U1.8
  Bottom Layer w0.3: J1.05 31.345,5.505 31.345,6.006 31.4,6.061 31.4,26.5 v1(32.5,27.6)
GPIO2: J1.07 U1.7 | length 25
  Top Layer w0.3: v1(33.6,28.7) 33.614,28.7 33.764,28.85 U1.7
  Bottom Layer w0.3: v1(33.6,28.7) 33.6,28.686 33.65,28.636 J1.07
GPIO3: J1.09 U1.6 | length 26.8
  Top Layer w0.3: U1.6 35.125,30.1 v1(36.6,30.1)
  Bottom Layer w0.3: J1.09 37,6.08 37,29.7 v1(36.6,30.1)
GPIO4: J1.11 U1.5 | length 28.4
  Top Layer w0.3: U1.5 35.195,31.3 v1(36.5,31.3)
  Bottom Layer w0.3: v1(36.5,31.3) 38.73,29.07 J1.11
GPIO5: J1.13 U1.4 | length 30.8
  Top Layer w0.3: U1.4 35.165,32.6 v1(36.6,32.6)
  Bottom Layer w0.3: v1(36.6,32.6) 41.27,27.93 J1.13
GPIO6: J1.15 U1.25 | length 31.3
  Top Layer w0.3: J1.15 43.81,24.366 51.804,32.36 52.305,32.36 U1.25
GPIO7: BOOT.2 J1.17 U1.15 | length 57
  Top Layer w0.35: BOOT.2 20.3,4.2 22.782,4.2 25.446,1.536 46.845,1.536 47.544,2.235 ; J1.17 47.544,4.076 47.544,2.387 47.62,2.311 48.395,1.536 49.385,1.536 50.236,2.387 50.236,17.891 52.305,19.96 U1.15
GPIO8: J1.19 U1.16 | length 17.8
  Top Layer w0.3: J1.19 48.89,18.016 51.804,20.93 52.305,20.93 U1.16
GPIO9: J1.21 U1.17 | length 19
  Top Layer w0.3: J1.21 53.759,7.599 53.759,21.847 53.406,22.2 52.905,22.2 U1.17
GPIO10: J1.23 U1.18 | length 20.1
  Top Layer w0.3: U1.18 52.905,23.47 53.93,23.47 54.5,22.9 54.5,6.133 53.97,5.603 J1.23
GPIO11: J1.24 U1.19 | length 24.7
  Top Layer w0.3: U1.19 52.905,24.74 54.414,24.74 54.59,24.564 55.139,24.015 55.139,3.899 J1.24
GPIO12: J1.22 U1.20 | length 30.7
  Top Layer w0.3: J1.22 52.599,1.561 54.454,1.561 55.7,2.807 55.7,24.3 53.99,26.01 52.905,26.01 U1.20
GPIO13: J1.20 U1.21 | length 27.7
  Top Layer w0.3: J1.20 48.89,2.914 48.123,3.681 48.123,4.384 47.721,4.786 47.721,23.197 51.804,27.28 52.305,27.28 U1.21
GPIO14: J1.18 U1.23 | length 31.4
  Top Layer w0.3: v1(50.9,29.1) 51.62,29.82 52.305,29.82 U1.23
  Bottom Layer w0.3: J1.18 45.181,3.899 45.181,23.381 v1(50.9,29.1)
GPIO15: J1.16 U1.24 | length 32.6
  Top Layer w0.3: J1.16 45.181,4.101 45.181,24.467 51.804,31.09 52.305,31.09 U1.24
NetB1_2: B1.2 C10.2 | length 2.5
  Top Layer w0.4: C10.2 13.85,44.25 14.075,44.025 14.075,43.975 14.815,43.235 B1.2
NetB1_3: B1.3 R10.1 R11.2 | length 7.5
  Top Layer w0.5: R10.1 13.916,42.298 14.249,41.965 B1.3 15.964,42.04 16.496,42.04 17.702,43.247 R11.2@17.702,46.2
NetB1_6: B1.6 D4.2 R9.1 | length 6.3
  Top Layer w0.5: R9.1 D4.2 19.4,40.586 20.704,41.89 21.236,41.89 B1.6
NetB1_7: B1.7 R12.2 | length 2.4
  Top Layer w0.5: B1.7 22.916,43.235 23.384,43.702 R12.2
NetB1_8: B1.8 R11.1 R13.2 | length 4.4
  Top Layer w0.5: R11.1@19.179,46.548 21.346,46.548 R13.2 ; B1.8 R13.2@21.311,46.548
NetC3_2: C3.2 R2.1 RESET.1 U1.3 | length 58.2
  Top Layer w0.35: U1.3 35.235,33.8 v1(36.3,33.8) ; v1@43.222,33.822 46.749,37.349 53.533,37.349 55.559,35.323 55.559,29.541 56.4,28.7 56.4,11.571 58.998,8.974 R2.1 ; C3.2 59.024,4.204 59.024,5.974 R2.1 ; RESET.1 61.5,6 R2.1
  Bottom Layer w0.35: v1(36.3,33.8) v1(43.2,33.8)
NetC4_2: C4.2 RESET.2 | length 10.9
  Top Layer w0.35: C4.2 60.527,2.2 64.577,6.25 RESET.2
NetC5_2: BOOT.1 C5.2 | length 3.5
  Top Layer w0.3: C5.2 10.35,4.85 BOOT.1
NetC6_2: C6.2 J7.SHELL R6.2 | length 22.8
  Top Layer w0.3: J7.SHELL@72.889,6.68 77.069,6.68 J7.SHELL@77.069,15.32 ; J7.SHELL@72.889,15.32 J7.SHELL@77.069,15.32 ; C6.2 77.8,15.841 77.751,15.792 77.751,15.782 77.289,15.32 J7.SHELL@77.069,15.32
  Top Layer w0.35: R6.2 72.1,6.276 72.504,6.68 J7.SHELL@72.889,6.68
NetC11_1: C11.1 U2.6 | length 2.2
  Top Layer w0.35: U2.6 15.95,21.85 16.55,22.45 C11.1
NetC11_2: C11.2 L1.2 U2.2 | length 6.1
  Top Layer w0.35: U2.2 13.804,24.446 13.804,24.011 14.193,23.622 15.107,23.622 15.635,24.15 C11.2 18.573,24.15 L1.2
NetC15_1: C15.1 L2.1 U3.2 | length 10
  Top Layer w0.5: C15.1 v1(15.3,29.3) ; U3.2 20,31.5 ; v1(20.109,30.95) 20.071,30.988 20.071,31.429 20,31.5 ; L2.1 20,31.5
  Bottom Layer w0.5: v1@15.331,29.331 15.362,29.3 18.459,29.3 v1(20.109,30.95)
NetC15_2: C15.2 U3.6 | length 6.1
  Top Layer w0.5: C15.2 12,29.3 11.7,29.6 11.7,30.2 12.05,30.55 U3.6
NetC23_2: C23.2 C24.2 D10.1 J4.1 J6.1 R1.1 U5.7 | length 59
  Top Layer w0.381: C24.2 63.25,43.585 63.465,43.37 U5.7 63.465,42.473 65.188,40.75 C23.2 ; C24.2@63.25,45.55 64.328,46.628 66.328,46.628 67.246,47.546 67.246,56.754 65.543,58.457 J6.1@64.488,58.457 ; J6.1 J6.1@64.488,58.457 ; R1.1@64.8,50.973 64.8,58.145 J6.1@64.488,58.457 ; C23.2@67.95,40.75 68.745,39.955 70.155,39.955 70.985,40.785 71.665,40.785 D10.1
  Bottom Layer w0.381: J4.1 45.645,59.7 63.245,59.7 J6.1
NetC24_1: C24.1 C25.1 D10.2 J4.3 J6.3 J8.2 U5.6 | length 54.6
  Top Layer w0.381: v1(60.488,60.788) 61.787,59.489 61.787,58.618 J6.3 61.905,50.025 J8.2 ; C24.1 64.95,44.35 65,44.3 ; v1(65.9,44.3) 65,44.3 ; C25.1 69.5,41.477 ; v1(70.6,41.5) 70.556,41.545 69.568,41.545 69.5,41.477 ; v1(70.688,38.034) 70.749,38.095 71.315,38.095 71.538,38.318 71.538,38.745 71.673,38.88 D10.2 ; 65,44.3 64.824,44.124 64.824,43.01 U5.6 64.735,42.473 65.663,41.545 69.5,41.545 69.5,41.477
  Bottom Layer w0.381: J4.3 44.193,60.788 v1(60.488,60.788) ; J8.2 63.53,48.17 65.878,45.821 v1@65.878,44.322 ; v1(70.6,41.5) 70.644,41.456 70.644,38.078 v1(70.688,38.034)
NetCR1_1: CR1.1 J7.A6 J7.B6 | length 9.4
  Top Layer w0.2: CR1.1 68.926,10.15 69.526,10.75 J7.A6 73.35,10.75 73.6,11 73.6,11.5 73.35,11.75 J7.B6
NetCR1_3: CR1.3 J7.A7 J7.B7 | length 11.9
  Top Layer w0.2: CR1.3 66.488,11.962 68.76,11.962 69.226,11.495 ; v1(69.692,11.962) 69.226,11.495 ; v1(69.8,10.004) 70.458,10.004 70.75,10.296 72.268,10.296 J7.B7 ; J7.A7 69.471,11.25 69.226,11.495
  Bottom Layer w0.2: v1(69.692,11.962) 69.226,11.495 69.226,10.578 v1(69.8,10.004)
NetD1_A: D1.A J7.A4-B9 J7.B4-A9 | length 12.8
  Top Layer w0.2: J7.A4-B9 72.458,8.744 73.032,8.744 74.054,9.765 74.054,12.235 73.032,13.256 72.458,13.256 J7.B4-A9
  Top Layer w0.381: D1.A 69.163,14.2 69.963,13.4 J7.B4-A9
NetD2_1: D2.1 R7.2 | length 2.1
  Top Layer w0.3: R7.2@2.097,12.201 D2.1@2.097,14.247
  Top Layer w0.5: D2.1 D2.1@2.097,14.247 ; R7.2@2.097,12.201 R7.2
NetD3_1: D3.1 J1.01 TR1.9 | length 8
  Top Layer w0.381: D3.1 TR1.9
  Top Layer w0.4: D3.1 21.8,5.896 22.425,5.27 J1.01
NetD4_1: D4.1 R8.1 | length 1.8
  Top Layer w0.5: R8.1 17.626,36.876 19.374,36.876 D4.1
NetD7_1: D7.1 R16.1 | length 1.9
  Top Layer w0.25: D7.1 5.595,22.3 R16.1
NetD8_1: D8.1 R17.1 | length 1.9
  Top Layer w0.25: D8.1 5.595,24.8 R17.1
NetD9_1: D9.1 R18.1 | length 1.9
  Top Layer w0.25: D9.1 5.595,27.3 R18.1
NetF1_1: F1.1 TR1.16 | length 22.6
  Top Layer w0.381: F1.1@40.8,10.5 F1.1
  Top Layer w0.5: TR1.16 33.004,18.296 F1.1@40.8,10.5
NetF2_1: F2.1 TR1.15 | length 19.6
  Top Layer w0.381: F2.1@38.267,10.5 F2.1
  Top Layer w0.5: TR1.15 31.741,17.026 F2.1@38.267,10.5
NetF3_1: F3.1 TR1.14 | length 16.5
  Top Layer w0.381: F3.1@35.733,10.5 F3.1
  Top Layer w0.5: TR1.14 30.477,15.756 F3.1@35.733,10.5
NetF4_1: F4.1 TR1.13 | length 13.5
  Top Layer w0.381: F4.1@33.2,10.5 F4.1
  Top Layer w0.5: TR1.13 29.214,14.486 F4.1@33.2,10.5
NetF5_1: F5.1 TR1.12 | length 10.4
  Top Layer w0.381: F5.1@30.667,10.5 F5.1
  Top Layer w0.5: TR1.12 27.951,13.216 F5.1@30.667,10.5
NetF6_1: F6.1 TR1.11 | length 7.3
  Top Layer w0.5: TR1.11 26.687,11.946 28.133,10.5 F6.1
NetF7_1: F7.1 TR1.10 | length 4.3
  Top Layer w0.381: TR1.10 TR1.10@21.876,10.6 ; F7.1@25.9,10.6 F7.1
  Top Layer w0.5: TR1.10@21.876,10.6 F7.1@25.9,10.6
NetIC1_1: IC1.1 TR1.7 | length 5.2
  Top Layer w0.3: IC1.1 14.596,9.376 15.896,10.676 TR1.7
NetIC1_2: IC1.2 TR1.6 | length 5.2
  Top Layer w0.3: IC1.2 14.596,10.646 15.896,11.946 TR1.6
NetIC1_3: IC1.3 TR1.5 | length 5.2
  Top Layer w0.3: IC1.3 14.596,11.916 15.896,13.216 TR1.5
NetIC1_4: IC1.4 TR1.4 | length 5.2
  Top Layer w0.3: IC1.4 14.596,13.186 15.896,14.486 TR1.4
NetIC1_5: IC1.5 TR1.3 | length 5.2
  Top Layer w0.3: IC1.5 14.596,14.456 15.896,15.756 TR1.3
NetIC1_6: IC1.6 TR1.2 | length 5.2
  Top Layer w0.3: IC1.6 14.596,15.726 15.896,17.026 TR1.2
NetIC1_7: IC1.7 TR1.1 | length 5.2
  Top Layer w0.3: IC1.7 14.596,16.996 15.896,18.296 TR1.1
NetIC1_11: IC1.11 R3.1 U1.10 | length 41.2
  Top Layer w0.4: IC1.11 7.826,15.726 v1(8.8,16.7) ; R3.1 32.627,29.331 29.3,26.004 v1(29.3,25) 35.065,25 U1.10
  Bottom Layer w0.4: v1(8.8,16.7) 17.1,25 v1(29.3,25)
NetIC1_15: IC1.15 R7.1 | length 9.2
  Top Layer w0.3: R7.1 2.216,10.602 4.458,8.361 7.198,8.361 7.454,8.617 7.454,9.917 6.725,10.646 IC1.15
NetJ3_1: J3.1 J4.5 J6.5 | length 40.3
  Top Layer w0.35: J3.1 59.371,45.671 v1(59.371,49.252) ; v1(58.4,61.8) 59.365,60.835 J6.5
  Bottom Layer w0.35: J4.5 42.665,61.8 v1(58.4,61.8) ; J6.5 59.365,49.257 v1(59.371,49.252)
NetJ4_2: J4.2 J5.1 | length 7.9
  Top Layer w0.381: J4.2 43.175,52.285 J5.1
NetJ4_4: J4.4 J5.3 | length 13.9
  Top Layer w0.381: J4.4 40.635,52.596 45.206,48.025 47.485,48.025 J5.3
NetJ4_6: J4.6 J5.2 | length 14.1
  Top Layer w0.381: J4.6 38.095,52.305 43.67,46.73 J5.2
NetJ4_8: J4.8 J5.4 | length 19.9
  Top Layer w0.381: J4.8 35.769,55.746 35.769,52.631 42.915,45.485 47.485,45.485 J5.4
NetJ4_G1: 
NetJ5_5: J5.5 J6.2 | length 18.1
  Bottom Layer w0.35: J5.5 52.499,48.041 59.341,48.041 63.175,51.875 J6.2
NetJ5_6: J5.6 J6.4 | length 16.7
  Top Layer w0.381: J5.6 52.515,45.485 54.326,45.485 60.48,51.64 60.48,55.805 J6.4
NetJ5_7: J5.7 J6.6 | length 8.5
  Top Layer w0.381: J5.7 58.095,53.555 J6.6
NetJ5_8: J5.8 J6.8 | length 11
  Top Layer w0.381: J5.8 52.565,47.975 52.565,52.97 J6.8
NetJ7_A5: J7.A5 R4.2 | length 12.2
  Top Layer w0.2: R4.2 60.798,10.184 61.681,9.3 70.448,9.3 70.898,9.75 J7.A5
NetJ7_B5: J7.B5 R5.2 | length 13.3
  Top Layer w0.2: v1(60.5,13.3) 60.5,12.498 R5.2 ; v1(68.5,12.8) 68.525,12.775 72.289,12.775 J7.B5
  Bottom Layer w0.2: v1(60.5,13.3) 60.635,13.3 60.829,13.106 68.133,13.106 68.439,12.8 v1(68.5,12.8)
NetJ8_1: J8.1 R1.2 | length 2.7
  Top Layer w0.381: J8.1 66.07,48.675 66.398,49.003 R1.2
NetR14_1: R14.1 R15.2 U2.4 | length 5.7
  Top Layer w0.35: R15.2 10.824,21.826 12.726,21.826 U2.4 12.854,21.746 12.854,21.312 13.966,20.2 R14.1
NetR19_1: R19.1 R20.2 U3.4 | length 4.4
  Top Layer w0.5: R19.1 R20.2 15.855,32.5 15.905,32.45 U3.4
NetSJ1_1: SJ1.1 U5.8 | length 18.7
  Top Layer w0.381: v1(62.2,40.8) U5.8@62.2,42.393 ; v1(75.22,37.825) 77.075,37.825 SJ1.1
  Bottom Layer w0.381: v1(62.2,40.8) 62.2,39.9 64.807,37.293 72.492,37.293 73.023,37.825 v1(75.22,37.825)
OUT0: F1.2 J1.14 | length 6.3
  Top Layer w0.5: F1.2 41.597,7.7 41.847,7.45 41.847,6.753 42.539,6.061 42.539,3.999 J1.14
OUT1: F2.2 J1.12 | length 6.3
  Top Layer w0.5: F2.2 39.067,7.7 39.317,7.45 39.317,6.478 39.999,5.796 39.999,3.999 J1.12
OUT2: F3.2 J1.10 | length 6.3
  Top Layer w0.5: F3.2 36.533,7.7 36.783,7.45 36.783,6.471 37.459,5.796 37.459,3.999 J1.10
OUT3: F4.2 J1.08 | length 6.3
  Top Layer w0.5: F4.2 34,7.7 34.25,7.45 34.25,6.465 34.919,5.796 34.919,3.999 J1.08
OUT4: F5.2 J1.06 | length 6.3
  Top Layer w0.5: F5.2 31.467,7.7 31.717,7.45 31.717,6.458 32.379,5.796 32.379,3.999 J1.06
OUT5: F6.2 J1.04 | length 6.3
  Top Layer w0.5: F6.2 28.933,7.7 29.183,7.45 29.183,6.451 29.839,5.796 29.839,3.999 J1.04
OUT6: F7.2 J1.02 | length 6.3
  Top Layer w0.5: F7.2 26.4,7.7 27.299,6.801 27.299,3.999 J1.02
RCK: IC1.12 U1.12 | length 32.2
  Top Layer w0.4: IC1.12 7.956,14.456 v1(8.839,15.339) ; v1(28.915,22.3) 28.934,22.319 34.924,22.319 U1.12
  Bottom Layer w0.4: v1(8.839,15.339) 15.8,22.3 v1(28.915,22.3)
RX: U1.26 U6.2 | length 16.1
  Top Layer w0.35: U1.26 53.945,33.93 54.456,33.42 54.456,33.339 54.6,33.195 v1(54.6,33.1) ; v1(60.9,24) 60.965,23.935 U6.2
  Bottom Layer w0.35: v1(54.6,33.1) 57.654,30.046 57.913,30.046 60.9,27.06 v1(60.9,24)
SI: IC1.14 U1.11 | length 35
  Top Layer w0.4: IC1.14 8.316,11.916 v1(8.8,12.4) ; v1(29.8,23.6) 29.881,23.6 30.051,23.77 U1.11
  Bottom Layer w0.4: v1(8.8,12.4) 17.6,21.2 29.485,21.2 29.8,21.515 v1(29.8,23.6)
TX: U1.27 U6.3 | length 17.8
  Top Layer w0.35: U1.27 53.973,35.2 54.7,34.473 v1(54.7,34.4) ; v1(62.2,24) 62.2,22.234 U6.3
  Bottom Layer w0.35: v1(54.7,34.4) 54.773,34.4 62.2,26.973 v1(62.2,24)
USB_N: CR1.4 U1.13 | length 61.2
  Top Layer w0.35: U1.13 35.38,21.505 35.917,21.505 37.616,23.204 37.616,30.776 45.396,38.557 54.033,38.557 56.767,35.823 56.767,30.088 57.608,29.247 57.608,18.392 62.321,13.679 62.321,13.657 63.356,12.623 63.356,12.154 63.46,12.05 CR1.4
USB_P: CR1.6 U1.14 | length 63
  Top Layer w0.35: U1.14 35.38,20.235 35.917,20.235 38.22,22.538 38.22,30.526 45.646,37.953 53.783,37.953 56.163,35.573 56.163,29.838 57.004,28.997 57.004,18.12 62.504,12.62 62.504,10.89 63.14,10.254 63.565,10.254 CR1.6
pads on no net: BOOT.3 BOOT.4 IC1.9 J4. J4.7 J6. J6.7 J7.17 J7.18 J7.A8 J7.B8 RESET.3 U1.22 U2.5 U4.10 U5.5

## Polygon pours and split planes (outlines as drawn)
GND on Top Layer "GND_L01_P015" (solid, pour order 15): 29.694,50.006 0,50.006 0,0 79.9,0 79.9,24.65 80.006,24.756 79.563,25.2 60.1,25.2 58.9,26.4 57.2,28.1 57.2,36.9 52.3,41.8 37.9,41.8
CAN_GND on Top Layer "CAN_GND_L01_P019" (solid, pour order 19): 30,52.4 38.5,43.9 52.1,43.9 53.5,42.5 59,37 59,31.3 61.1,29.2 80,29.2 80,48.6 78.5,50.1 71,50.1 69.9,51.2 69.9,74 68.9,75 31,75 30,74 30,52.5
GND on Top Layer "GND_L01_P012" (solid, pour order 12): 15.375,35.8 15.375,33.1 16.875,33.1 16.875,29.4 18.075,28.2 21.575,28.2 22.575,27.2 22.575,24.4 22.875,24.1 24.275,24.1 24.575,24.4 24.575,28.35 22.925,30 18.175,30 18.175,33 17.375,33 17.375,35.8
GND on Bottom Layer "GND_L02_P018" (solid, pour order 18): 29.7,50.01 0.006,50.01 0.006,0.003 79.906,0.003 79.906,24.653 80.013,24.76 79.569,25.203 60.106,25.203 58.906,26.403 57.206,28.103 57.206,36.903 52.306,41.803 37.906,41.803
CAN_GND on Bottom Layer "CAN_GND_L02_P016" (solid, pour order 16): 30,52.4 38.5,43.9 52.1,43.9 53.5,42.5 59,37 59,31.3 61.1,29.2 80,29.2 80,48.6 78.5,50.1 71,50.1 69.9,51.2 69.9,74 68.9,75 31,75 30,74 30,52.5

## Keep-outs
Keep-Out Layer:
  the board outline again, w0.8

## Other copper
Top Layer:
  pour cut-out: 1.628,37 2.028,37.4 6.228,37.4 7.928,39.1 7.928,44.4 8.282,44.754 14.574,44.754 14.899,44.429 14.899,44.129 15.128,43.9 15.142,43.914 16.935,43.914 16.935,43.937 17.528,44.53 17.528,47.2 17.867,47.54 22.388,47.54 22.753,47.174 22.753,44.974 23.142,44.586 27.842,44.586 28.305,44.123 30.105,44.123 30.428,43.8 30.428,39.923 30.105,39.6 28,39.6 22.753,36.2 8.72,36.2 7.963,35.104 2.028,35.1 1.628,35.5

## Silkscreen, mask and mechanical layers (free items; w line width, h text height)
Top Overlay:
  text "A" at 78.85,39.7 h0.8
  text "B" at 78.85,37.45 h0.8
  text "C" at 78.85,35.2 h0.8
Bottom Overlay:
  drawing of 71 lines, arcs and shapes, not listed
  text "CAN-G" at 40.2,64.4 h1.52 r90
  text "CAN-L" at 42.7,64.4 h1.52 r90
  text "CAN-H" at 45.2,64.4 h1.52 r90
  text "CAN-G" at 60.1,64.4 h1.52 r90
  text "CAN-L" at 62.65,64.4 h1.52 r90
  text "CAN-H" at 65.2,64.4 h1.52 r90
  text "GND / 12V / 5V0 / 3V3" at 11.7,31.4 h2
  text "version 2.0" at 48.2,24.1 h1.52
  text "ESP32_CAN_V2" at 70.9,24.1 h1.52
  text "Designed by: Balazs Finaczy" at 70.9,20.8 h1.52
  text "CAN-Node" at 15.446,16.854 h1.52
  text "RX: BC" at 12.446,13.254 h1.52
  text "TXRX: AB" at 15.446,11.154 h1.52
Mechanical 2:
  circle w0.013: c76.506,3.506 r1.5
  circle w0.013: c3.506,46.506 r1.5
  circle w0.013: c3.506,3.506 r1.5
  circle w0.013: c76.506,46.506 r1.5
  circle w0.006: c0.006,0.006 r0.003
  circle w0.006: c80.006,0.006 r0.003
  circle w0.006: c70.006,75.006 r0.003
  circle w0.006: c30.006,50.006 r0.003
  circle w0.006: c70.006,50.006 r0.003
  circle w0.006: c0.006,50.006 r0.003
  circle w0.006: c0.006,0.006 r0.003
  circle w0.013: c76.506,46.506 r1.5
  circle w0.013: c76.506,3.506 r1.5
  circle w0.013: c3.506,3.506 r1.5
  circle w0.013: c3.506,46.506 r1.5
  circle w0.006: c70.148,75.006 r0.003
  circle w0.006: c0.006,50.006 r0.003
  circle w0.006: c80.006,0.006 r0.003
  circle w0.006: c30.148,50.006 r0.003
  circle w0.006: c70.148,50.006 r0.003
  circle w0.006: c0.006,0.006 r0.003
  circle w0.006: c0.006,0.006 r0.003
  lines w0.013: 0.006,1.506 ccw(c1.506,1.506) 1.506,0.006 78.506,0.006 ccw(c78.506,1.506) 80.006,1.506 80.006,48.006 ccw(c78.006,48.006) 78.006,50.006 71.506,50.006 cw(c71.506,51.506) 70.006,51.506 70.006,73.506 ccw(c68.506,73.506) 68.506,75.006 31.506,75.006 ccw(c31.506,73.506) 30.006,73.506 30.006,51.506 cw(c28.506,51.506) 28.506,50.006 1.506,50.006 ccw(c1.506,48.506) 0.006,48.506 0.006,1.506

## Text inside footprints (layer, text, board x,y; h text height)
CR1: Top Overlay "*" at 65.535,10.35 h0.5 r180; Mechanical 13 "*" at 65.535,10.35 h0.5 r180
TR1: Top Overlay "*" at 17.152,17.517 h1.27; Mechanical 13 "*" at 17.148,17.496 h1.27
U2: Top Overlay "*" at 13.915,23.975 h1.27 r270; Mechanical 13 "*" at 13.903,23.987 h1.27 r270
U3: Top Overlay "*" at 18.313,31.315 h1.27 r180; Mechanical 13 "*" at 18.313,31.322 h1.27 r180
U4: Top Overlay "*" at 67.613,23.778 h1.27 r90; Mechanical 13 "*" at 67.626,23.766 h1.27 r90
U5: Top Overlay "*" at 61.764,36.907 h1.27 r90; Mechanical 13 "*" at 62.944,38.27 h1.27 r90